# Altium PCB PCB1(1).PcbDoc
Units mm, origin at the board's own origin, x right, y up, seen from the top; angles counter-clockwise.
Board outline 38.1 x 74.93 mm, 2 copper layers (Top Layer, Bottom Layer); 20 components, 17 nets, 76 pads, 0 vias.
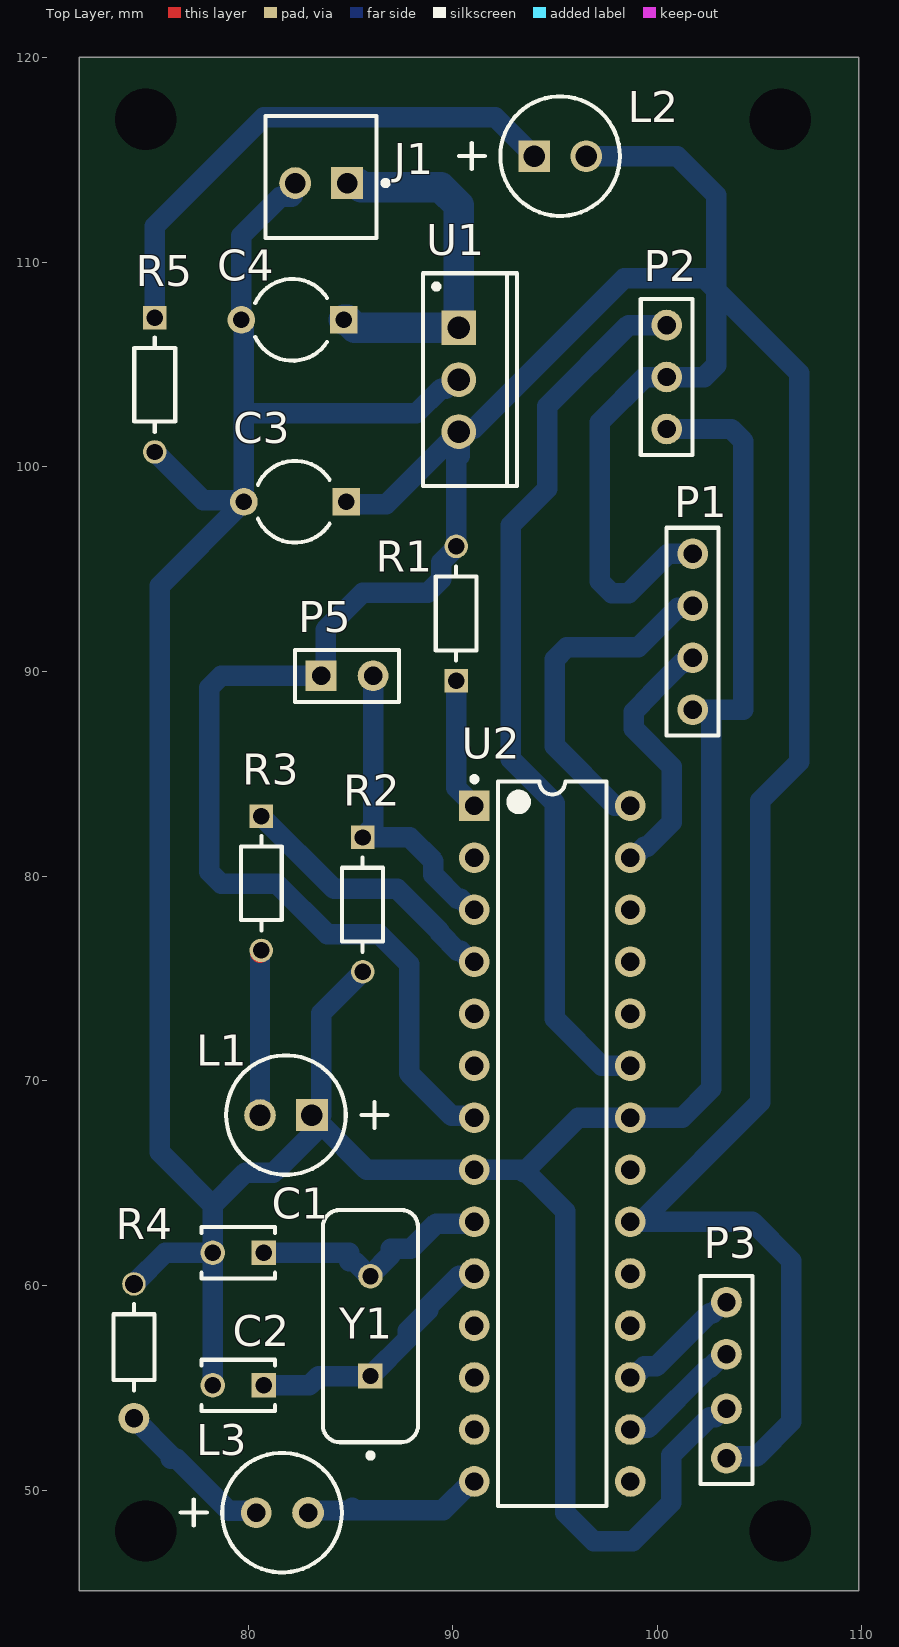
[diagram p0: Top Layer view]
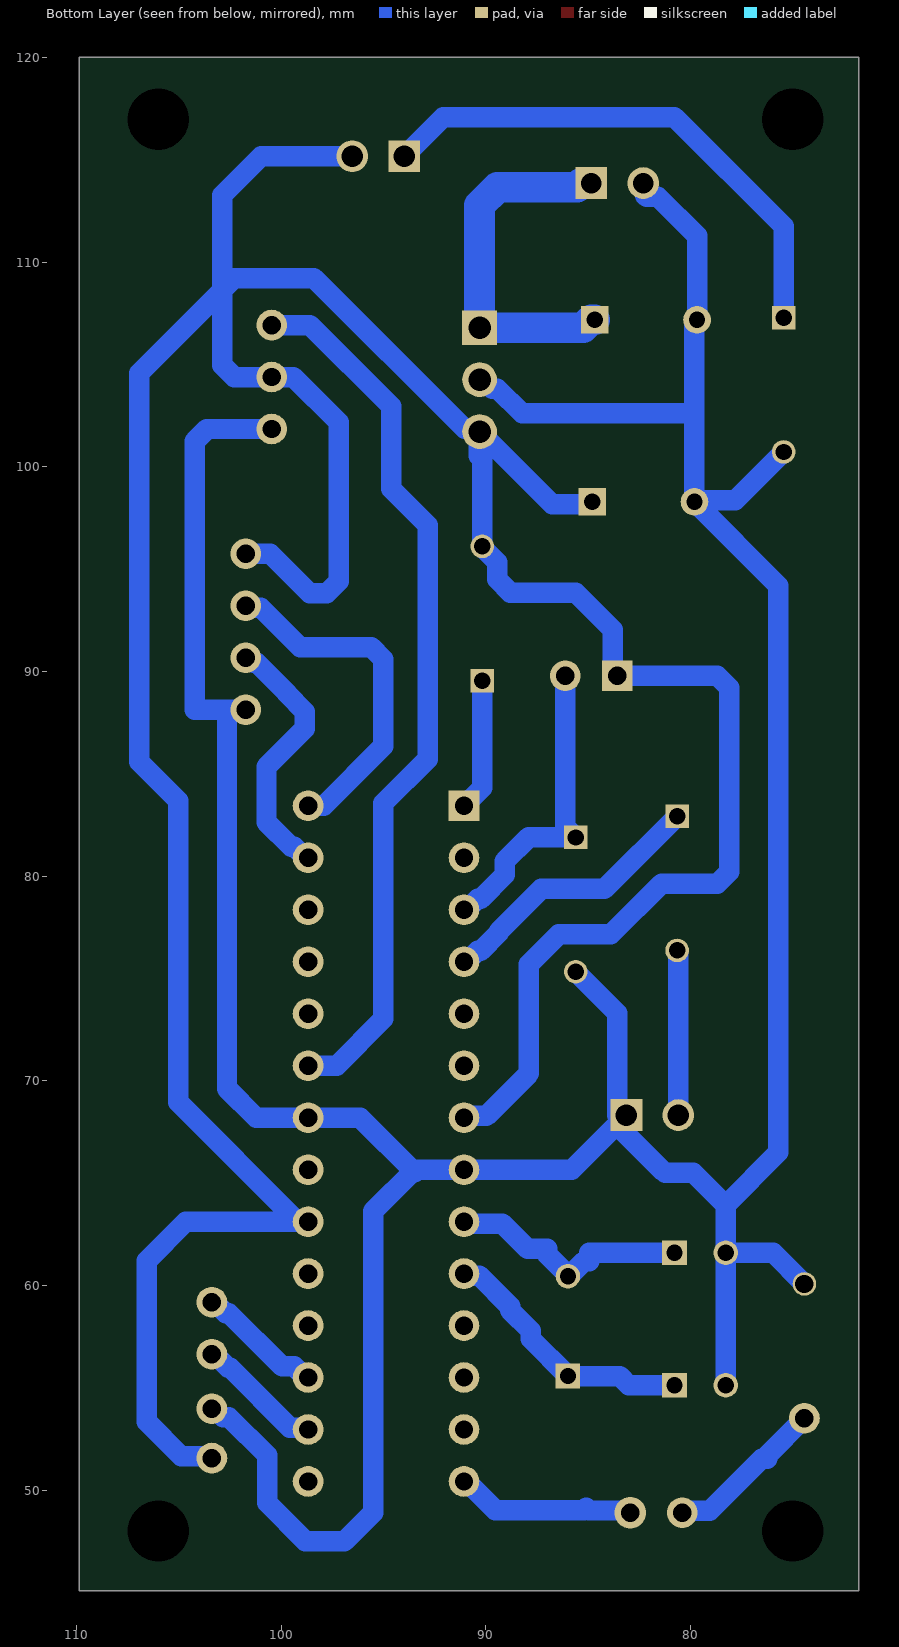
[diagram p1: Bottom Layer view, seen from below]

## Layer stack, top to bottom
Top Solder: solder mask 0.0102, Solder Resist, Dk 3.5
Top Layer: signal copper 0.0356
Dielectric 1: dielectric 0.32, FR-4, Dk 4.8
Bottom Layer: signal copper 0.0356
Bottom Solder: solder mask 0.0102, Solder Resist, Dk 3.5

## Board outline
71.755,45.085 109.855,45.085 109.855,120.015 71.755,120.015

## Design rules (kind name [scope] priority, off if disabled: settings)
Clearance [All] p1: gap=0.75 ignorepadtopadclearanceinfootprint=FALSE
HoleSize [All] p1: absolutevalues=TRUE maxlimit=3 minlimit=0.8 maxpercent=80.000 minpercent=20.000
PolygonConnect [All] p1: connectstyle=Relief reliefconductorwidth=0.254 reliefentries=4 polygonreliefangle="90 Angle" airgapwidth=0.254
RoutingVias [All] p1: holewidth=0.711 width=1.27 viastyle="Through Hole" minholewidth=0.711 minwidth=1.27 maxholewidth=0.711 maxwidth=1.27
SilkToSilkClearance [All] p1: silktosilkclearance=0.1
SolderMaskExpansion [All] p1: expansion=0.102 istentingtop=FALSE
Width Width_1 [InNet('+5') or InNet('GND')] p1: maxlimit=3 minlimit=1 preferedwidth=1
Width [All] p2: maxlimit=3 minlimit=1 preferedwidth=1
28 further rules are at their usual default settings.

## Components (designator, comment, footprint, x,y, rotation, side; value= is the part's Value field where it differs from the comment)
C1 "RCE5C1H220J0DBH03A" FP-RCE0DB-MFG 79.522,61.595 r180 top
C2 "RCE5C1H220J0DBH03A" FP-RCE0DB-MFG 79.522,55.118 r180 top
C3 "Cap2" CAPR5-4X5 82.296,98.298 r180 top value=0.1uF
C4 "Cap2" CAPR5-4X5 82.169,107.188 r180 top value=0.33uF
J1 "61900211121" FP-61900211121-MFG 83.566,114.173 r180 top
L1 "LED-RED" AVAG-HLMP-3301-2#1 83.121,68.326 r180 top
L2 "LED-RED" AVAG-HLMP-3301-2#1 93.98,115.189 r0 top
L3 "LED-RED" AVAG-HLMP-3301-2#2 80.391,48.895 r0 top
P1 "Max 30102" HDR1X4#1 101.727,95.758 r270 top
P2 "MAX 4466" HDR1X3 100.457,106.934 r270 top
P3 "Blutooth module" HDR1X4#2 103.378,59.182 r270 top
P5 "Push button" HDR1X2 83.566,89.789 r0 top
R1 "CF18JT10K0" FP-CF18-MFG#1 90.17,92.837 r90 top value=10kΩ
R2 "CF18JT10K0" FP-CF18-MFG#1 85.598,78.613 r270 top value=330Ω
R3 "CF18JT10K0" FP-CF18-MFG#1 80.645,79.651 r270 top value=330Ω
R4 "CF18JT10K0" FP-CF18-MFG#2 74.422,56.791 r90 top value=330Ω
R5 "CF18JT10K0" FP-CF18-MFG#1 75.438,104.013 r270 top value=1kΩ
U1 "L7805CV" TO220 90.297,104.267 r270 top
U2 "ATmega328-PU" 28P3 94.869,66.929 r0 top locked
Y1 "FOXSLF/160-20" FOX-FOXSLF160-20 85.979,58.012 r90 top

## Footprints (in the part's own frame and the unit in brackets; to place one, negate y for a bottom-side part, rotate by r counter-clockwise, add the part's x,y. Pads: shape width x height; smd on the part's side, far side on the other; paste and mask are expansions set on the pad)
28P3 [mm] "28-Pin Plastic Dual In-Line Package (PDIP)"
  rect 1.5x1.5 hole 0.9: 1(-3.81,16.51)
  round 1.5 hole 0.9: 2(-3.81,13.97) 3(-3.81,11.43) 4(-3.81,8.89) 5(-3.81,6.35) 6(-3.81,3.81) 7(-3.81,1.27) 8(-3.81,-1.27) 9(-3.81,-3.81) 10(-3.81,-6.35) 11(-3.81,-8.89) 12(-3.81,-11.43) 13(-3.81,-13.97) 14(-3.81,-16.51) 15(3.81,-16.51) 16(3.81,-13.97) 17(3.81,-11.43) 18(3.81,-8.89) 19(3.81,-6.35) 20(3.81,-3.81) 21(3.81,-1.27) 22(3.81,1.27) 23(3.81,3.81) 24(3.81,6.35) 25(3.81,8.89) 26(3.81,11.43) 27(3.81,13.97) 28(3.81,16.51)
  silkscreen extent -3.93,-17.7 2.65,17.93, body extent -3.6,-17.65 3.6,17.65, height 4.58
AVAG-HLMP-3301-2#1 [mm] "THD, 2-Leads, Body Dia 5.85mm"
  rect 1.55x1.55 hole 1.05: 1(0,0)
  round 1.55 hole 1.05: 2(2.54,0)
  silkscreen extent -3.68,-2.92 4.19,2.92
AVAG-HLMP-3301-2#2 [mm] "THD, 2-Leads, Body Dia 5.85mm"
  round 1.5 hole 0.9: 1(0,0)
  round 1.55 hole 0.9: 2(2.54,0)
  silkscreen extent -3.68,-2.92 4.19,2.92
CAPR5-4X5 [mm] "Capacitor; 2 Leads"
  rect 1.35x1.35 hole 0.8: 1(-2.5,0)
  round 1.35 hole 0.8: 2(2.5,0)
  silkscreen extent -1.69,-2 1.82,2
FOX-FOXSLF160-20 [mm] "THD, 2-Leads, Body 11.35x4.65mm"
  rect 1.2x1.2 hole 0.8: 1(-2.44,0)
  round 1.2 hole 0.8: 2(2.44,0)
  silkscreen extent -6.45,-2.32 5.68,2.32, body extent -5.67,-2.32 5.68,2.33, height 3.6
FP-61900211121-MFG [mm]
  rect 1.55x1.55 hole 1 paste-1000 mask+0: 1(-1.27,0.3)
  round 1.55 hole 1 paste-1000 mask+0: 2(1.27,0.3)
  silkscreen extent -3.27,-2.98 2.71,2.98, body extent -2.81,-3.08 2.81,3.08, height 0.25
FP-CF18-MFG#1 [mm]
  rect 1.15x1.15 hole 0.8 paste-1000 mask+0: 1(-3.28,0)
  round 1.15 hole 0.8 paste-1000 mask+0: 2(3.28,0)
  silkscreen extent -2.3,-1 2.3,1, body extent -3.96,-1.1 3.96,1.1, height 0.25
FP-CF18-MFG#2 [mm]
  round 1.5 hole 0.9: 1(-3.28,0)
  round 1.15 hole 0.9 paste-1000 mask+0: 2(3.28,0)
  silkscreen extent -1.93,-1 2.3,1, body extent -3.96,-1.1 3.96,1.1, height 0.25
FP-RCE0DB-MFG [mm]
  rect 1.2x1.2 hole 0.8 paste-1000 mask+0: 1(-1.25,0)
  round 1.2 hole 0.8 paste-1000 mask+0: 2(1.25,0)
  silkscreen extent -1.8,-1.25 1.8,1.25, body extent -1.95,-1.35 1.95,1.35, height 0.25
HDR1X2 [mm] "Connector; Header; 2 Position"
  rect 1.5x1.5 hole 0.9: 1(0,0)
  round 1.5 hole 0.9: 2(2.54,0)
  silkscreen extent -1.27,-1.27 3.81,1.27
HDR1X3 [mm] "Connector; Header; 3 Position"
  round 1.5 hole 0.9: 1(0,0) 2(2.54,0) 3(5.08,0)
  silkscreen extent -1.27,-1.27 6.35,1.27
HDR1X4#1 [mm] "Connector; Header; 4 Position"
  round 1.5 hole 0.9: 1(0,0) 2(2.54,0) 3(5.08,0) 4(7.62,0)
  silkscreen extent -1.27,-1.27 8.89,1.27
HDR1X4#2 [mm] "Connector; Header; 4 Position"
  round 1.5 hole 0.9: 1(0,0) 2(2.54,0) 3(5.207,0) 4(7.62,0)
  silkscreen extent -1.27,-1.27 8.89,1.27
TO220 [mm] "TO, Thru-Hole, Vertical, Heatsink Mounted; 3 In-Line Leads; Pitch 2.54 mm"
  rect 1.7x1.7 hole 1.1: 1(-2.54,0)
  round 1.7 hole 1.1: 2(0,0) 3(2.54,0)
  silkscreen extent -5.2,-1.75 5.2,2.85, body extent -5.25,-1.8 5.25,2.9, height 19.7

## Part data
C1 C2: library part CMP-06035-057691-1, "Cap Ceramic 22pF 50V C0G ±5% Radial 2.5mm +125°C Ammo Pack", Capacitance=22pF, Case/Package=Radial, Dielectric=C0G, Max Operating Temperature=125°C, Min Operating Temperature=-55°C, Package Quantity=2000, Ratings=AEC-Q200, Resistor Type=Ceramic, Tolerance=5%, Voltage Rating=50V, Height=3.5mm, Height - Seated (Max)=0.138inch, Lead Diameter=0.5mm, Lead Pitch=0.098inch, Lead/Base Style=Straight, Length=0.142inch, Mount="Through Hole", Packaging="Tape and Reel", Termination=Radial, Voltage Rating (DC)=50V, Width=0.098inch
C3 C4: "Capacitor", PackageDescription="Capacitor; 2 Leads", PackageReference=CAPR5-4X5, Published=23-Sep-2002, Publisher="Altium Limited"
J1: library part CMP-1502-00584-2, "CONN HEADER VERT 2POS 2.54MM", Color=Beige, Current Rating=3A, Flammability Rating="UL94 V-0", Insulation Resistance=1GR, Max Operating Temperature=105°C, Min Operating Temperature=-40°C, Package Quantity=1000, Voltage Rating=250V, Connector Type=Header, Contact Finish - Mating=TIN, Contact Gender=Male, Contact Material="Copper Alloy", Contact Mating Length=0.295inch, Contact Plating=Tin, Contact Shape=Square, Contact Type="Male Pin", Fastening Type=Friction, Gender=Male, Height=14.2mm, Housing Material=Nylon, Insulation Color=Beige, Insulation Material=Nylon, Length=5.8mm, Mount="Through Hole", Number of Contacts=2, Number of Positions=2, Number of Rows=1, Packaging=Bulk, Pitch=2.54mm, RoHS Compliant=Yes, Series=WR-WTB, Termination="Through Hole", Width=5.12mm
L1 L2 L3: library part CMP-2000-06411-1, "T-1 3/4 (5 mm) Diffused LED Lamp, 1.9 V, -40 to 100 degC, 2-Pin THD, RoHS, Bulk", Emitting Color=Red, Forward Current=25mA, Forward Voltage=2.4V, Manufacturer=Avago, Operating Temp Range=-40Cto100C, Operating Temperature Classification=Industrial, Package Description="2-Pin Through Hole LED, Dia 5.85 mm", Package Reference=HLMP-3301, Package Type=T-13/4, Power Dissipation=85W, Reverse Voltage=5V, Test Current (It)=10mA, Chip Material=GaP, Datasheet URL=http://www.avagotech.com/docs/AV02-1558EN, Datasheet Version=03/2015, DELETED=Compliant, Dominant Wave Length=626nm, High Brightness=No, Lens Dimensions=5.08x5.08x8.3mm, Lens Type=ColoredDiffused, Lum Intensity=5.4mcd, Luminous Intensity=5.4mcd, Main Category=StandardLED, Manufacturer URL=http://www.avagotech.com/, Mounting=ThroughHole, Mounting Technology=ThroughHole, Number of  Elements=1, Packaging=TapeandReel, Peak Wavelength=635nm, Pin Count=2, Product Depth (mm)=6.1mm, Product Height (mm)=9.19mm, Product Length (mm)=6.1mm, Rad Hardened=No, Shape Type=Circular, Type=Uni-Color, Viewing Angle=60deg
P1 P3: library part "Header 4", "Header, 4-Pin", LatestRevisionDate=17-Jul-2002, LatestRevisionNote="Re-released for DXP Platform.", Publisher="Altium Limited"
P2: library part "Header 3", "Header, 3-Pin", LatestRevisionDate=17-Jul-2002, LatestRevisionNote="Re-released for DXP Platform.", Publisher="Altium Limited"
P5: library part "Header 2", "Header, 2-Pin", LatestRevisionDate=17-Jul-2002, LatestRevisionNote="Re-released for DXP Platform.", Publisher="Altium Limited"
R1: library part CMP-26528-000002-1, "RES 10K OHM 1/8W 5% CF AXIAL", Manufacturer="Stackpole Electronics", Package=CF18, Power Rating=0.125W, Resistance=10kΩ, Temperature="-55°C to +155°C", Temperature Coefficient=0-500ppm/°C, Temperature Range High=+155°C, Temperature Range Low=-55°C, Tolerance=5%, Voltage Rating=250V, Automotive=No, Category=Res, ComponentLink2Description=Datasheet, ComponentLink2URL=http://www.seielect.com/Catalog/SEI-CF_CFM.pdf, Composition="Carbon Film", Device Class L1="Passive Components", Device Class L2=Resistors, Device Class L3="Through-Hole Resistors", Digikey Description="RES 10K OHM 1/8W 5% CF AXIAL", Height=2mm, Ipc Land Pattern Name=RESAD656W65L360D200, Lead Free=Yes, Manufacturer Part Number=CF18JT10K0, Octopart=https://octopart.com/cf18jt10k0-stackpole+electronics-19205642, RoHS=TRUE, Series=CF
R2 R3 R4: library part CMP-26528-000002-1, "RES 10K OHM 1/8W 5% CF AXIAL", Manufacturer="Stackpole Electronics", Package=CF18, Power Rating=0.125W, Resistance=330Ω, Temperature="-55°C to +155°C", Temperature Coefficient=0-500ppm/°C, Temperature Range High=+155°C, Temperature Range Low=-55°C, Tolerance=5%, Voltage Rating=250V, Automotive=No, Category=Res, ComponentLink2Description=Datasheet, ComponentLink2URL=http://www.seielect.com/Catalog/SEI-CF_CFM.pdf, Composition="Carbon Film", Device Class L1="Passive Components", Device Class L2=Resistors, Device Class L3="Through-Hole Resistors", Digikey Description="RES 10K OHM 1/8W 5% CF AXIAL", Height=2mm, Ipc Land Pattern Name=RESAD656W65L360D200, Lead Free=Yes, Manufacturer Part Number=CF18JT10K0, Octopart=https://octopart.com/cf18jt10k0-stackpole+electronics-19205642, RoHS=TRUE, Series=CF
R5: library part CMP-26528-000002-1, "RES 10K OHM 1/8W 5% CF AXIAL", Manufacturer="Stackpole Electronics", Package=CF18, Power Rating=0.125W, Resistance=1kΩ, Temperature="-55°C to +155°C", Temperature Coefficient=0-500ppm/°C, Temperature Range High=+155°C, Temperature Range Low=-55°C, Tolerance=5%, Voltage Rating=250V, Automotive=No, Category=Res, ComponentLink2Description=Datasheet, ComponentLink2URL=http://www.seielect.com/Catalog/SEI-CF_CFM.pdf, Composition="Carbon Film", Device Class L1="Passive Components", Device Class L2=Resistors, Device Class L3="Through-Hole Resistors", Digikey Description="RES 10K OHM 1/8W 5% CF AXIAL", Height=2mm, Ipc Land Pattern Name=RESAD656W65L360D200, Lead Free=Yes, Manufacturer Part Number=CF18JT10K0, Octopart=https://octopart.com/cf18jt10k0-stackpole+electronics-19205642, RoHS=TRUE, Series=CF
U1: library part CMP-0244-00483-1, "Positive Voltage Regulator, 5V, 3-Pin TO-220", ComponentLink1Description="Manufacturer URL", ComponentLink1URL=http://www.st.com, ComponentLink2Description=Datasheet, ComponentLink2URL=http://www.st.com/internet/com/TECHNICAL_RESOURCES/TECHNICAL_LITERATURE/DATASHEET/CD00000444.pdf, ComponentLink3Description="Package Specification", ComponentLink3URL=http://www.st.com/internet/com/TECHNICAL_RESOURCES/TECHNICAL_LITERATURE/PACKAGE_INFORMATION/CD00004649.pdf, DatasheetVersion=16/11/2011, PackageDescription="TO, Thru-Hole, Vertical, Heatsink Mounted; 3 In-Line Leads; Pitch 2.54 mm", PackageReference=TO220, PackageVersion=ver3.0
U2: library part CMP-0095-00015-2, "8-bit AVR Microcontroller, 32KB Flash, 1KB EEPROM, 2KB SRAM, 28-pin PDIP, Industrial Grade (-40°C to 85°C)", ComponentLink1Description="Manufacturer URL", ComponentLink1URL=http://www.atmel.com/, ComponentLink2Description="ATmega48A/48PA/88A/88PA/168A/168PA/328/328P Datasheet", ComponentLink2URL=http://www.atmel.com/dyn/resources/prod_documents/8271.pdf, ComponentLink3Description="ATmega48A/48PA/88A/88PA/168A/168PA/328/328P Summary", ComponentLink3URL=http://www.atmel.com/dyn/resources/prod_documents/8271S.pdf, DatasheetVersion="revD, May-2011", PackageDescription="28-lead (0.300\"/7.62mm Wide) Plastic Dual Inline Package (PDIP)", PackageReference=28P3, PackageVersion="revB, Sep-2001", RevisionNote="DatasheetVersion updated. URLs added."
Y1: library part CMP-1749-00003-1, "Resistance Weld Thru-Hole Crystal, 16 MHz, -20 to 70 degC, 2-Pin THD, RoHS, Bulk", Case\Package=Axial, Max Operating Temperature="155 degC", Min Operating Temperature="-55 degC", Package Quantity=200, Power Rating="250 mW", Resistance="221 kohm", Tolerance=1%, Voltage Rating="250 V", ComponentLink1Description="Manufacturer URL", ComponentLink1URL=http://www.foxonline.com/, ComponentLink2Description=Datasheet, ComponentLink2URL=http://www.foxonline.com/pdfs/hc49slf.pdf, DatasheetVersion=Mar-15, Length="0.248 inch", Mount="Through Hole", PackageDescription="2-Pin Through Hole Device, Body 11.35 x 4.65 mm", PackageReference=FOXSLF160-20, Packaging=Bulk, RoHSCompliant=true

## Free pads (board coordinates)
  round 1 hole 3 unplated: 2(106,117) 3(75,117) 4(75,48) 5(106,48)

## Nets (pads, with @x,y where several pads share a name; then routed paths per layer and width w, separated by ;. In a path a pad name is that pad's centre, name@x,y a point inside that pad or via, vN(x,y) a via of type N, cw(c..) or ccw(c..) an arc to the next point about the centre after c; other vN are vias at no path point)
+5: C3.1 L2.2 P1.1 P2.2 P3.4 P5.1 R1.2 U1.3 U2.7 U2.20 | length 182.5
  Bottom Layer w1: C3.1 84.917,98.177 86.747,98.177 U1.3 ; U2.7 90.976,68.282 89.96,68.282 87.884,70.358 87.884,75.692 86.418,77.158 83.878,77.158 81.407,79.629 78.691,79.629 78.105,80.215 78.105,89.203 78.691,89.789 P5.1 83.784,90.007 83.784,92.039 85.602,93.857 88.789,93.857 89.434,94.502 89.434,95.341 90.17,96.076 R1.2 90.17,100.38 90.335,100.546 90.335,101.689 U1.3 ; L2.2 100.965,115.189 102.87,113.284 102.87,108.634 ; U2.20@98.814,63.119 U2.20 ; P1.1 100.521,95.758 98.593,93.831 97.765,93.831 97.179,94.416 97.179,102.178 99.395,104.394 P2.2 102.284,104.394 102.87,104.98 102.87,108.634 ; P3.4 103.474,51.658 104.871,51.658 106.553,53.34 106.553,61.214 104.648,63.119 U2.20 ; U1.3 90.431,101.861 91.03,101.861 98.389,109.22 102.284,109.22 102.87,108.634 ; U2.20 98.775,63.215 99.283,63.215 105.029,68.961 105.029,83.693 106.934,85.598 106.934,104.57 102.87,108.634
GND: C1.2 C2.2 C3.2 C4.2 J1.2 L1.1 P1.4 P2.3 P3.3 R2.2 R4.2 R5.2 U1.2 U2.8 U2.22 | length 191.7
  Bottom Layer w1: R4.2 75.946,61.595 C1.2 ; R5.2 77.806,98.365 79.729,98.365 C3.2 ; C2.2 C1.2 ; J1.2 82.191,113.768 82.191,113.26 82.135,113.204 81.581,113.204 79.669,111.292 C4.2 79.669,107.093 79.796,106.966 79.796,102.616 ; L1.1 83.598,67.85 85.788,65.659 U2.8 ; L1.1@83.439,67.691 81.386,65.638 81.368,65.638 81.23,65.5 79.851,65.5 78.272,63.921 ; L1.1@83.566,68.326 83.566,73.301 R2.2 ; U1.2 90.108,104.267 89.668,103.827 89.427,103.827 88.216,102.616 79.796,102.616 ; U2.22 U2.22@98.814,68.199 ; P2.3 103.621,101.854 104.207,101.268 104.207,88.138 102.641,88.138 ; P1.4 102.641,88.138 ; P3.3 103.243,53.975 102.83,53.562 102.55,53.562 100.679,51.691 100.679,49.371 98.806,47.498 96.901,47.498 95.504,48.895 95.504,63.627 93.472,65.659 U2.8 ; C1.2 78.272,63.921 ; 78.272,63.921 75.692,66.501 75.692,94.194 C3.2 ; C3.2 79.796,102.616 ; U2.8 93.345,65.659 93.472,65.532 96.139,68.199 U2.22@98.814,68.199 ; U2.22@98.814,68.199 101.219,68.199 102.641,69.621 102.641,88.138
NetC1_1: C1.1 U2.9 Y1.2 | length 12.3
  Bottom Layer w1: C1.1 84.936,61.595 84.936,61.168 85.209,61.168 85.925,60.452 Y1.2 85.979,60.506 86.983,61.51 86.983,61.782 87.944,61.782 89.185,63.023 90.963,63.023 U2.9
NetC2_1: C2.1 U2.10 Y1.1 | length 12.9
  Bottom Layer w1: C2.1 82.998,55.118 83.452,55.572 Y1.1 87.803,57.396 87.803,57.777 88.809,58.783 88.809,58.971 90.321,60.483 90.963,60.483 U2.10
NetC4_1: C4.1 J1.1 U1.1 | length 17.7
  Bottom Layer w1.5: C4.1 84.847,107.188 85.228,106.807 U1.1 90.297,112.786 89.418,113.665 85.533,113.665 85.35,113.848 84.861,113.848 J1.1
NetL1_2: L1.2 R3.2 | length 8.1
  Top Layer w1: R3.2@80.581,76.267 80.645,76.33 R3.2
  Bottom Layer w1: L1.2 R3.2@80.581,76.267
NetL2_1: L2.1 R5.1 | length 26
  Bottom Layer w1: R5.1 75.438,111.76 80.772,117.094 92.075,117.094 L2.1
NetL3_1: L3.1 R4.1 | length 8
  Bottom Layer w1: R4.1 76.229,51.704 76.229,51.533 76.505,51.533 79.047,48.991 80.295,48.991 L3.1
NetL3_2: L3.2 U2.14 | length 8.8
  Bottom Layer w1: L3.2 83.036,49 84.966,49 85.093,49.127 85.198,49.022 89.527,49.022 90.924,50.419 U2.14
NetP1_2: P1.2 U2.28 | length 16.9
  Bottom Layer w1: U2.28 97.917,83.439 94.996,86.36 94.996,90.6 95.582,91.186 99.06,91.186 100.996,93.122 101.631,93.122 P1.2
NetP1_3: P1.3 U2.27 | length 12.9
  Bottom Layer w1: U2.27 98.814,80.899 99.354,81.439 99.507,81.439 100.711,82.643 100.711,85.344 98.839,87.216 98.839,88.044 99.727,88.932 99.727,88.966 101.189,90.428 101.342,90.428 101.592,90.678 P1.3
NetP2_1: P2.1 U2.23 | length 43.7
  Bottom Layer w1: U2.23 97.282,70.739 94.996,73.025 94.996,83.566 92.837,85.725 92.837,97.147 94.615,98.925 94.615,102.959 98.59,106.934 P2.1
NetP3_1: P3.1 U2.17 | length 6.2
  Bottom Layer w1: U2.17 98.814,55.499 99.354,56.039 99.947,56.039 102.55,58.642 102.703,58.642 103.243,59.182 P3.1
NetP3_2: P3.2 U2.16 | length 6.4
  Bottom Layer w1: U2.16@98.814,52.959 U2.16 98.775,53.055 99.567,53.055 102.488,55.975 102.576,55.975 103.243,56.642 P3.2
NetP5_2: P5.2 R2.1 U2.3 | length 15.4
  Bottom Layer w1: P5.2 86.106,82.401 R2.1 87.906,81.893 89.059,80.74 89.059,80.071 90.231,78.899 90.384,78.899 90.924,78.359 U2.3
NetR1_1: R1.1 U2.1 | length 6.5
  Bottom Layer w1: R1.1 90.17,84.328 U2.1
NetR3_1: R3.1 U2.4 | length 13.4
  Bottom Layer w1: R3.1 84.201,79.375 87.28,79.375 89.36,77.295 89.36,77.23 90.231,76.359 90.384,76.359 90.924,75.819 U2.4
pads on no net: U2.2 U2.5 U2.6 U2.11 U2.12 U2.13 U2.15 U2.18 U2.19 U2.21 U2.24 U2.25 U2.26

## Silkscreen, mask and mechanical layers (free items; w line width, h text height)
Outline:
  lines w0.254: 72.263,45.974 72.263,119.253 72.39,119.38 109.22,119.38 109.22,47.003 109.22,45.847 109.093,45.72 72.517,45.72 72.263,45.974